# Altium PCB PCB1.PcbDoc
Units mm, origin at the board's own origin, x right, y up, seen from the top; angles counter-clockwise.
Board outline 63.63 x 56.77 mm, 2 copper layers (Top Layer, Bottom Layer), stack 1.671 mm thick; 38 components, 28 nets, 99 pads, 18 vias.
Unrouted connection lines stored in the file: 6.
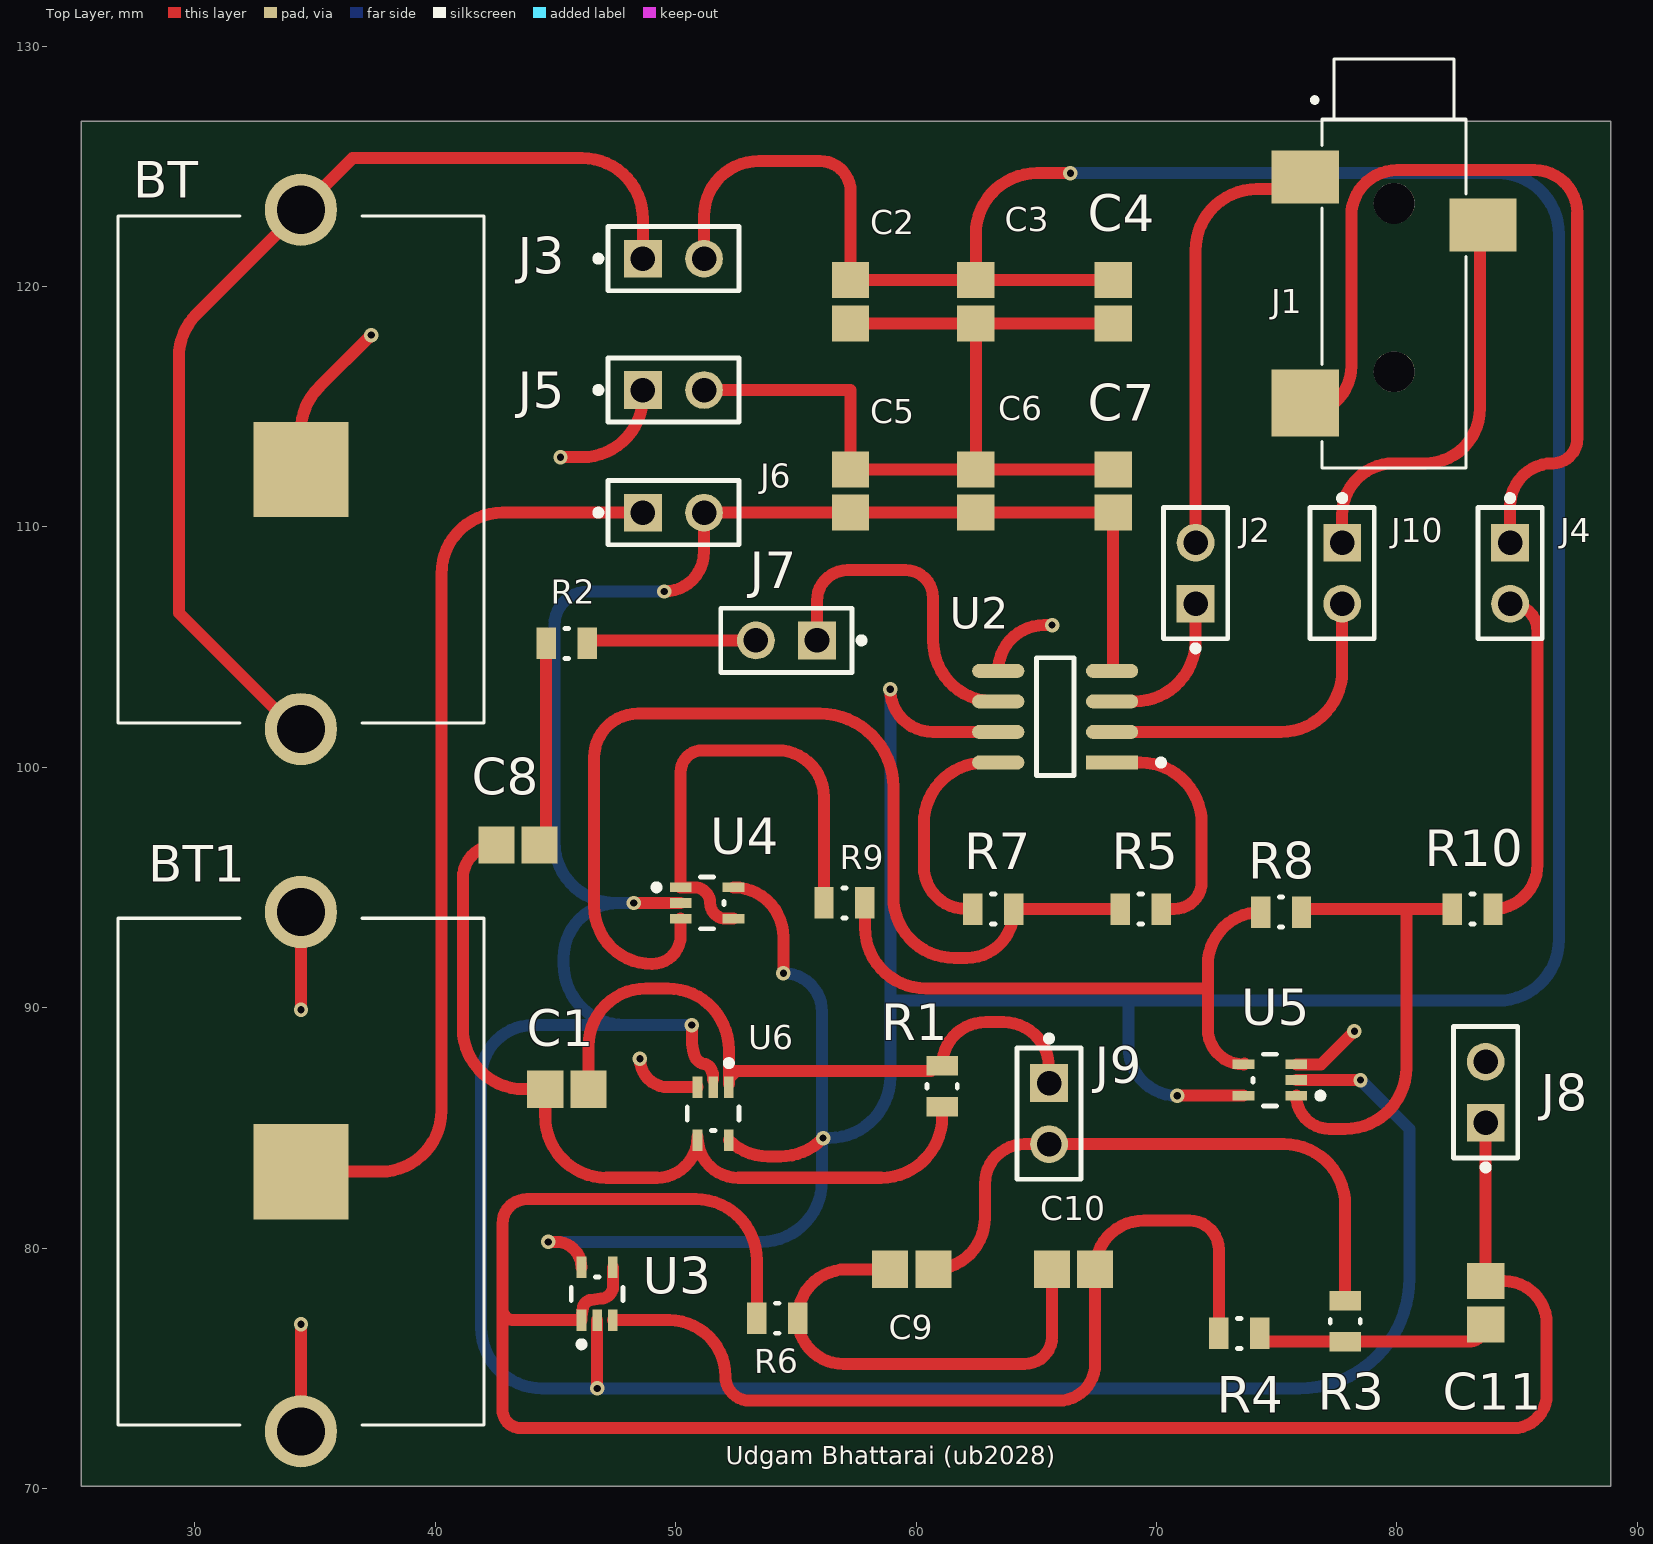
[diagram p0: Top Layer view]
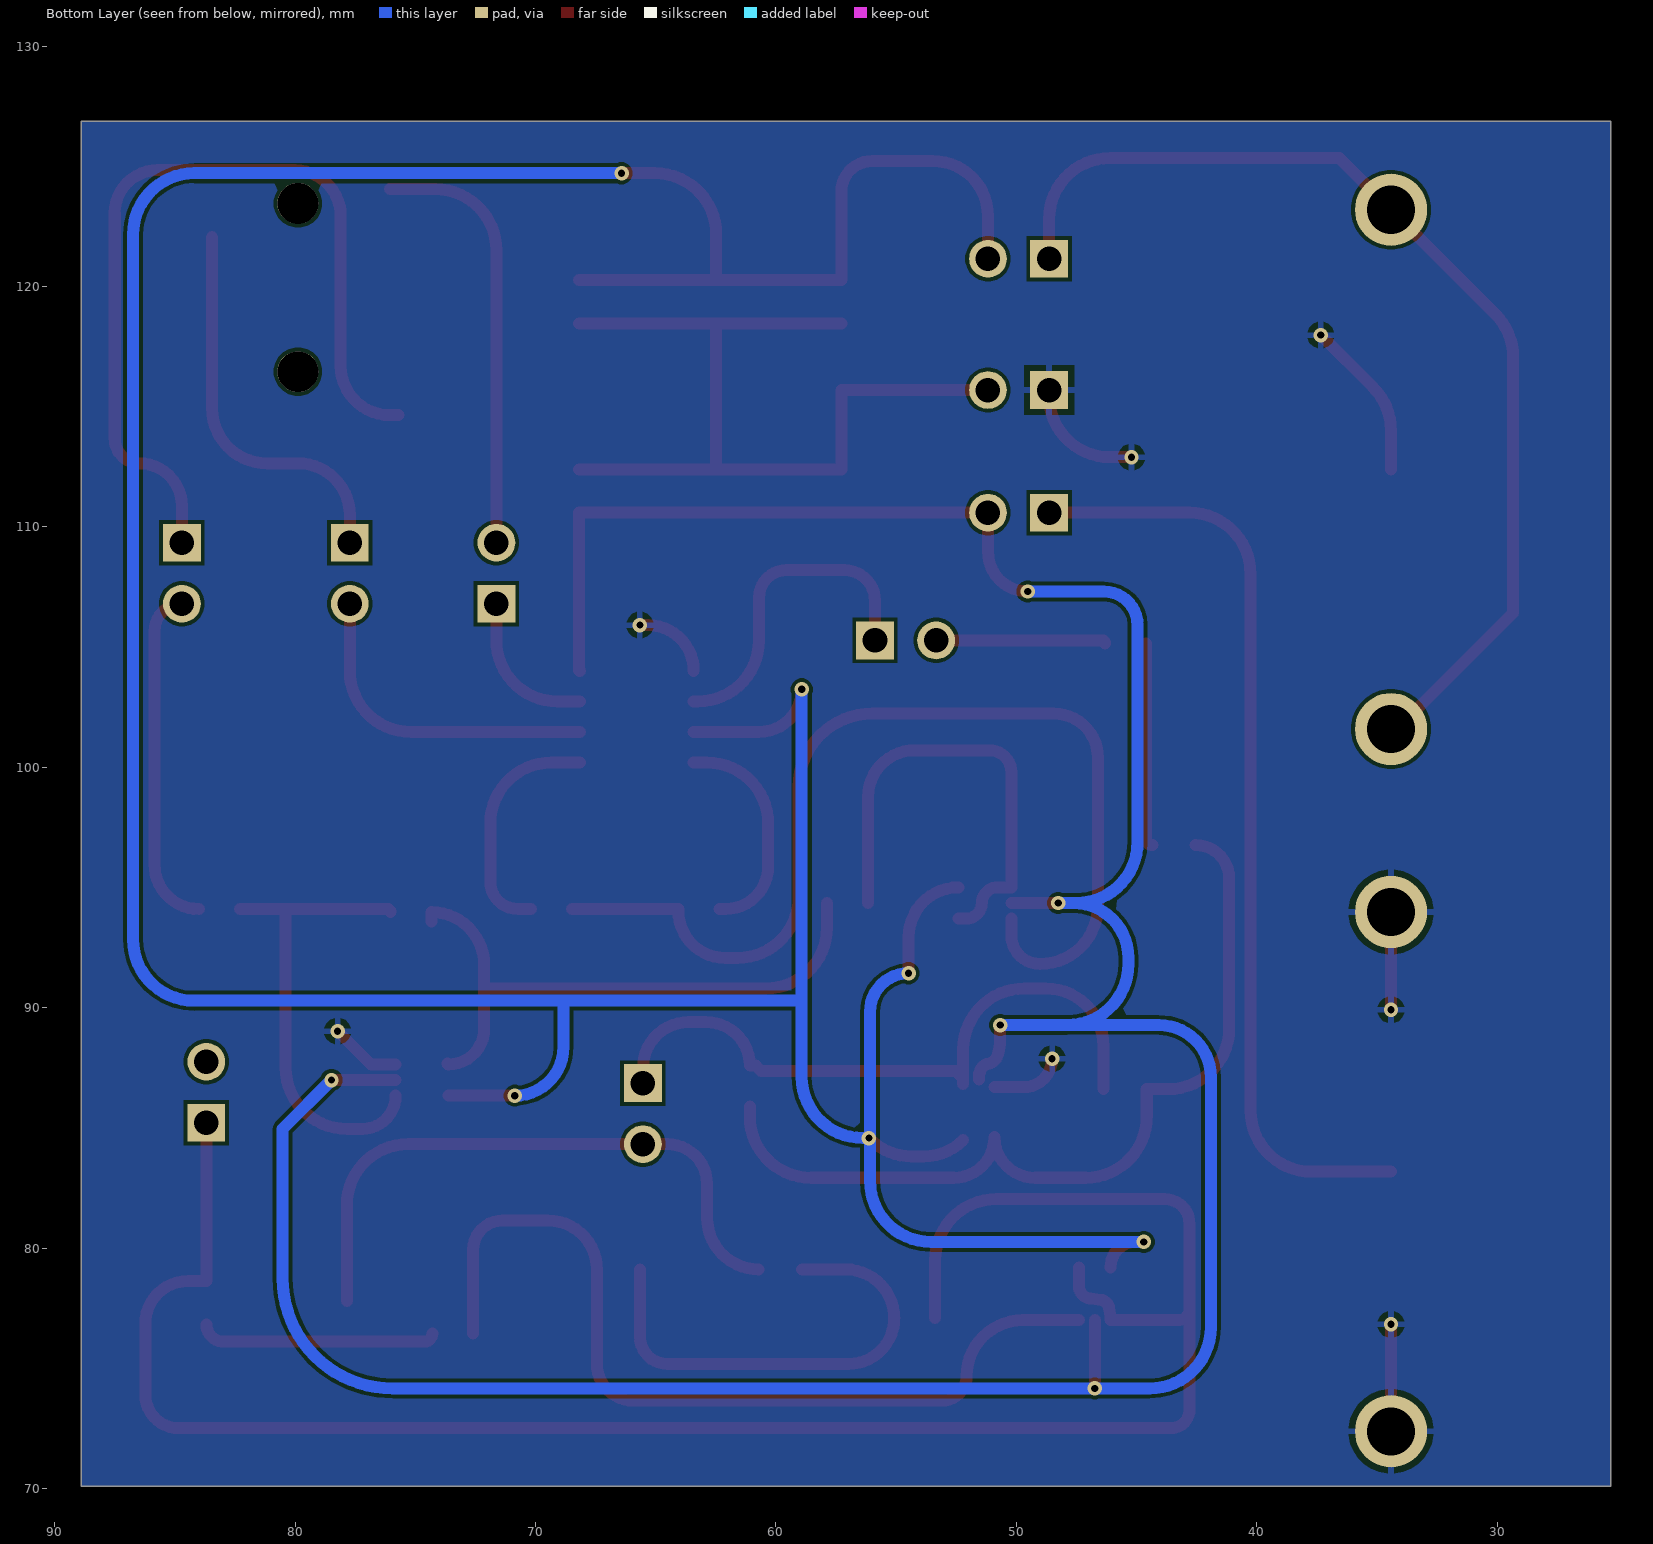
[diagram p1: Bottom Layer view, seen from below]
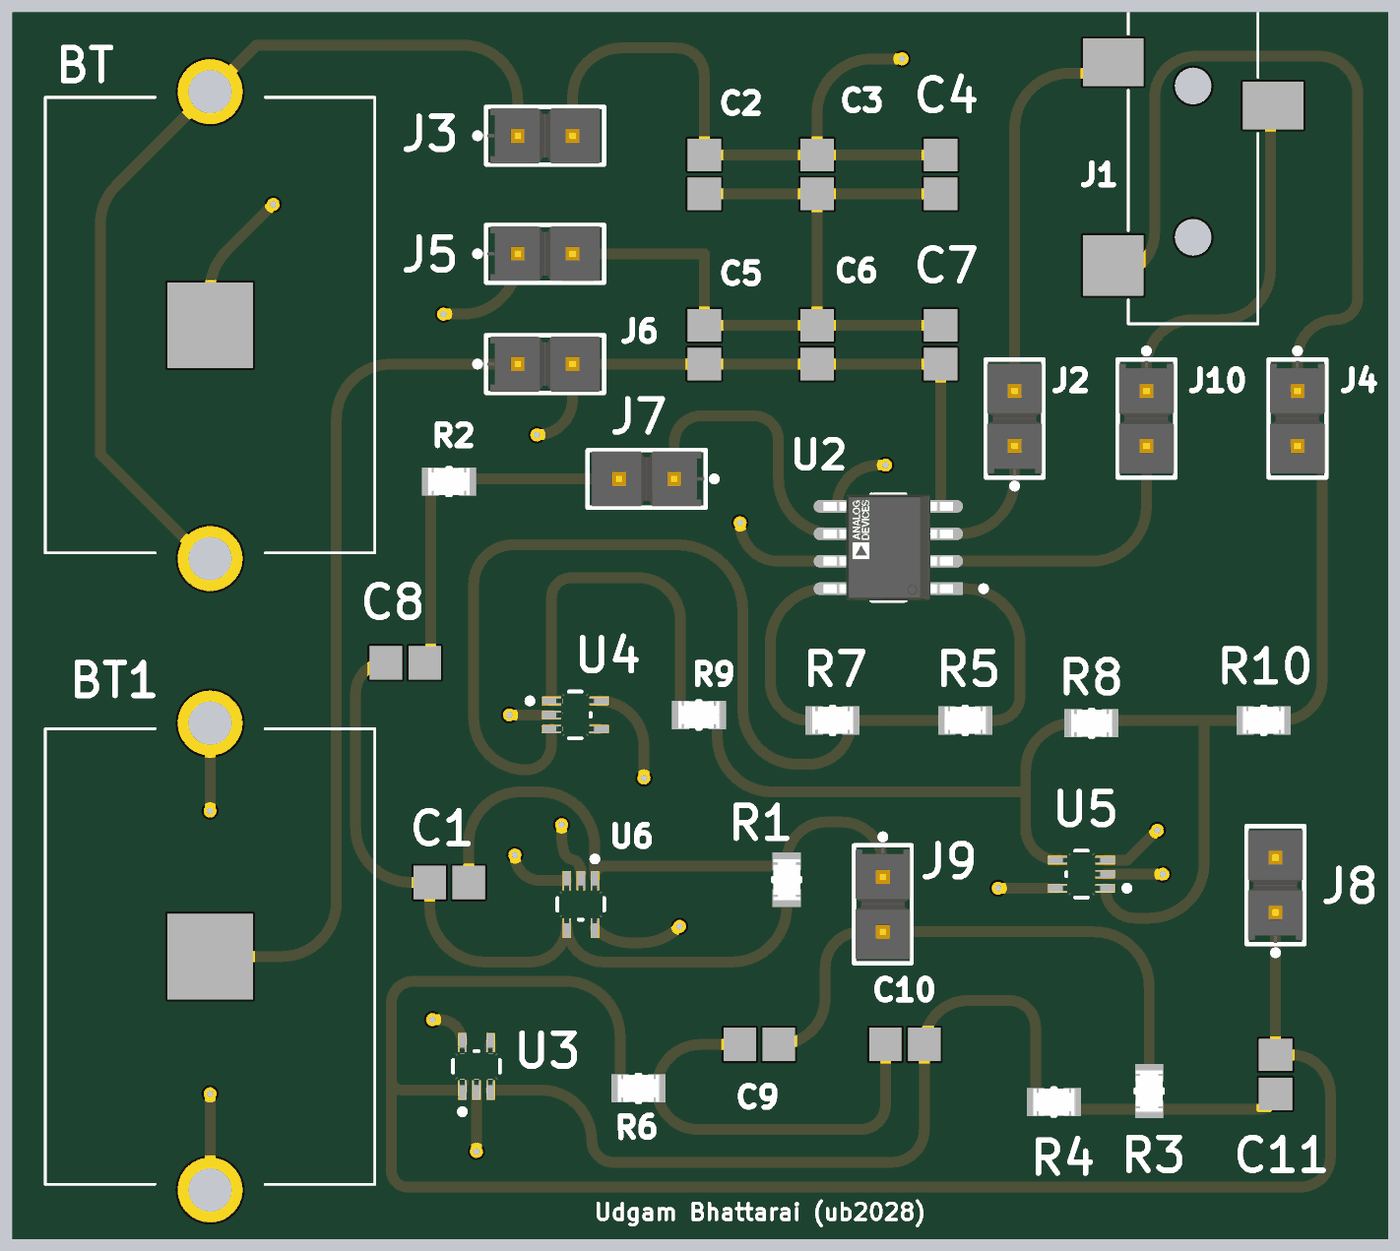
[diagram p2: 3D render of the assembled board from above, using the file's embedded part models]

## Layer stack, top to bottom
Top Solder: solder mask 0.0102, Solder Resist, Dk 3.5
Top Layer: signal copper 0.0356
Dielectric 1: dielectric 1.6, FR-4, Dk 4.8
Bottom Layer: signal copper 0.0356
Bottom Solder: solder mask 0.0102, Solder Resist, Dk 3.5

## Board outline
25.273,70.104 25.273,126.873 88.9,126.873 88.9,70.104

## Design rules (kind name [scope] priority, off if disabled: settings)
Clearance [All] p1: gap=0.15 ignorepadtopadclearanceinfootprint=TRUE except(0.3: Arc-Via Track-Via)
HoleSize [All] p1: absolutevalues=TRUE maxlimit=6 minlimit=0.254 maxpercent=80.000 minpercent=20.000
MinimumSolderMaskSliver [All] p1: minsoldermaskwidth=0.095
PolygonConnect [All] p1: connectstyle=Relief reliefconductorwidth=0.254 reliefentries=4 polygonreliefangle="90 Angle" airgapwidth=0.254
RoutingVias [All] p1: holewidth=0.3 width=0.6 viastyle="Through Hole" minholewidth=0.3 minwidth=0.6 maxholewidth=0.3 maxwidth=0.6
SilkToSilkClearance [All] p1: silktosilkclearance=0.15
SilkToSolderMaskClearance [IsPad] p1: minsilkscreentomaskgap=0.1 clearancetoexposedcopper=TRUE
SolderMaskExpansion [All] p1: expansion=0.102 istentingtop=FALSE
SupplyNets "Schematic Supply Nets" [InNet('GND')] p1: voltage=0.000
UnRoutedNet [All] p1: checkbadconnections=TRUE
Width [All] p1: maxlimit=1 minlimit=0.3 preferedwidth=0.5
25 further rules are at their usual default settings.

## Components (designator, comment, footprint, x,y, rotation, side; value= is the part's Value field where it differs from the comment)
BT "BK-913-TR" BAT_BK-913-TR 34.417,112.395 r270 top
BT1 "BK-913-TR" BAT_BK-913-TR 34.417,83.185 r270 top
C1 "C0805C225K9PACTU" CAPC2013X145X50ML20T25 45.477,86.614 r180 top
C2 "C0805C225K9PACTU" CAPC2013X145X50ML20T25 57.277,119.369 r90 top
C3 "C0805C225K9PACTU" CAPC2013X145X50ML20T25 62.484,119.369 r90 top
C4 "C0805C225K9PACTU" CAPC2013X145X50ML20T25 68.199,119.369 r90 top
C5 "C0805C225K9PACTU" CAPC2013X145X50ML20T25 57.277,111.495 r90 top
C6 "C0805C225K9PACTU" CAPC2013X145X50ML20T25 62.484,111.495 r90 top
C7 "C0805C225K9PACTU" CAPC2013X145X50ML20T25 68.199,111.495 r90 top
C8 "C0805C225K9PACTU" CAPC2013X145X50ML20T25 43.445,96.774 r0 top
C9 "C0805C225K9PACTU" CAPC2013X145X50ML20T25 59.817,79.121 r0 top
C10 "C0805C225K9PACTU" CAPC2013X145X50ML20T25 66.548,79.121 r180 top
C11 "C0805C225K9PACTU" CAPC2013X145X50ML20T25 83.693,77.735 r90 top
J1 "SJ-3523-SMT-TR" CUI_SJ-3523-SMT-TR 79.883,123.459 r270 top
J2 "TSW-102-07-L-S" FP-TSW-102-07-L-S-MFG 71.628,108.077 r90 top
J3 "TSW-102-07-L-S" FP-TSW-102-07-L-S-MFG 49.911,121.158 r0 top
J4 "TSW-102-07-L-S" FP-TSW-102-07-L-S-MFG 84.709,108.077 r270 top
J5 "TSW-102-07-L-S" FP-TSW-102-07-L-S-MFG 49.911,115.697 r0 top
J6 "TSW-102-07-L-S" FP-TSW-102-07-L-S-MFG 49.911,110.595 r0 top
J7 "TSW-102-07-L-S" FP-TSW-102-07-L-S-MFG 54.61,105.283 r180 top
J8 "TSW-102-07-L-S" FP-TSW-102-07-L-S-MFG 83.693,86.487 r90 top
J9 "TSW-102-07-L-S" FP-TSW-102-07-L-S-MFG 65.532,85.598 r270 top
J10 "TSW-102-07-L-S" FP-TSW-102-07-L-S-MFG 77.724,108.077 r270 top
R1 "CRCW080516K0FKEA" FP-CRCW0805-e3-IPC_C 61.087,86.741 r90 top
R2 "CRCW080516K0FKEA" FP-CRCW0805-e3-IPC_C 45.466,105.156 r180 top
R3 "CRCW080516K0FKEA" FP-CRCW0805-e3-IPC_C 77.851,76.962 r270 top
R4 "CRCW080516K0FKEA" FP-CRCW0805-e3-IPC_C 73.444,76.454 r180 top
R5 "CRCW080516K0FKEA" FP-CRCW0805-e3-IPC_C 69.342,94.107 r0 top
R6 "CRCW080516K0FKEA" FP-CRCW0805-e3-IPC_C 54.229,77.089 r0 top
R7 "CRCW080516K0FKEA" FP-CRCW0805-e3-IPC_C 63.208,94.107 r0 top
R8 "CRCW080516K0FKEA" FP-CRCW0805-e3-IPC_C 75.184,93.98 r0 top
R9 "CRCW080516K0FKEA" FP-CRCW0805-e3-IPC_C 57.023,94.361 r0 top
R10 "CRCW080516K0FKEA" FP-CRCW0805-e3-IPC_C 83.147,94.107 r0 top
U2 "AD620ARZ-REEL7" FP-R-8-IPC_B 65.786,102.108 r180 top
U3 "TLV521DCKT" FP-DCK0005A-MFG 46.736,78.105 r90 top
U4 "TLV521DCKT" FP-DCK0005A-MFG 51.308,94.361 r0 top
U5 "TLV521DCKT" FP-DCK0005A-MFG 74.719,86.995 r180 top
U6 "TLV521DCKT" FP-DCK0005A-MFG 51.562,85.598 r270 top

## Footprints (in the part's own frame and the unit in brackets; to place one, negate y for a bottom-side part, rotate by r counter-clockwise, add the part's x,y. Pads: shape width x height; smd on the part's side, far side on the other; paste and mask are expansions set on the pad)
BAT_BK-913-TR [mm]
  round 3 hole 2: 1(-10.8,0) 2(10.8,0)
  rect 3.96x3.96 smd: 3(0,0)
  silkscreen extent -10.54,-7.62 10.54,7.62
CAPC2013X145X50ML20T25 [mm] "Chip Capacitor, 2-Leads, Body 2.00x1.25mm, IPC Low Density"
  rect 1.5x1.55 smd: 1(-0.9,0) 2(0.9,0)
  body extent -1.1,-0.72 1.1,0.72, height 1.45
CUI_SJ-3523-SMT-TR [mm]
  rect 2.2x2.8 smd: 1(-1.1,-3.7) 3(0.9,3.7)
  rect 2.8x2.8 smd: 2(8.3,-3.7)
  round 1.7 hole 1.7 unplated: ""(0,0) ""(7,0)
  silkscreen extent -6,-3.4 11,3
FP-CRCW0805-e3-IPC_C [mil]
  rect 31.75x51.5 smd paste+0 mask+0: 1(-33.5,0) 2(33.5,0)
  silkscreen extent -3,-25 3,25, body extent -53,-31 53,31, height 10
FP-DCK0005A-MFG [mm]
  rect 0.9x0.4 smd paste-1000 mask+0: 1(-1.1,0.65) 2(-1.1,0) 3(-1.1,-0.65) 4(1.1,-0.65) 5(1.1,0.65)
  silkscreen extent -2.22,-1.07 0.7,1.07, body extent -1.65,-1.33 1.65,1.33, height 0.25
FP-R-8-IPC_B [mm]
  rect 2.174x0.582 smd paste+0 mask+0: 1(-2.366,1.905)
  rrect100% 2.174x0.582 smd paste+0 mask+0: 2(-2.366,0.635) 3(-2.366,-0.635) 4(-2.366,-1.905) 5(2.366,-1.905) 6(2.366,-0.635) 7(2.366,0.635) 8(2.366,1.905)
  silkscreen extent -4.53,-2.45 0.78,2.45, body extent -3.7,-2.7 3.7,2.7, height 0.25
FP-TSW-102-07-L-S-MFG [mm]
  rect 1.57x1.57 hole 1.02 paste-2539.97 mask+0: 1(-1.27,0)
  round 1.57 hole 1.02 paste-2539.97 mask+0: 2(1.27,0)
  silkscreen extent -3.25,-1.34 2.73,1.34, body extent -2.83,-1.44 2.83,1.44, height 0.25

## Part data
BT BT1: "Battery Retainer Coin, 20.0mm 1 Cell PC Pin", Package="MSOP-12 MPD", Digi-Key_Part_Number=BK-913-CT-ND, MF="MPD (Memory", MP=BK-913-TR, SnapEDA_Link=https://www.snapeda.com/parts/BK-913-TR/MPD%20(Memory%20Protection%20Devices)/view-part/576523/?ref=snap
C1 C2 C3 C4 C5 C6 C7 C8 C9 C10 C11: library part CMP-1036-04819-2, Manufacturer=Kemet, Part Number=C0805C225K9PACTU
J1: "<b>Audio Jack Connector</b> 3.5 mm Low Profile Surface Mount Stereo Jack, 3 Pin Right-Angle", Package=None, Availability=Unavailable, MP=SJ-3523-SMT-TR, Price=None
J2 J3 J4 J5 J6 J7 J8 J9 J10: library part CMP-02766-001428-1, "CONN HEADER VERT 2POS 2.54MM", Color=Black, Current Rating=7.6A, Max Operating Temperature=125°C, Max Voltage Rating (AC)=550V, Min Operating Temperature=-55°C, Package Quantity=1, Connector Type="Male Pin", Contact Material=Bronze, Contact Mating Length=0.23inch, Contact Plating=Gold, Contact Type="Male Pin", Depth=2.54mm, Gender=Male, Housing Color=Black, Housing Material=Polyester, Lead Free="Lead Free", Length=5.08mm, Max Current Rating=7.6A, Mount="Through Hole", Number of Contacts=2, Number of Positions=2, Number of Rows=1, Orientation=Straight, Packaging=Bulk, Pitch=2.54mm, Radiation Hardening=No, REACH SVHC="No SVHC", RoHS Compliant=Yes, Series=TSW, Termination=Solder, Voltage Rating=550V, Width=2.54mm
R1 R2 R3 R4 R5 R6 R7 R8 R9 R10: library part CMP-2001-04979-2, "RES Thick Film, 16kΩ, 1%, 0.125W, 100ppm/°C, 0805", Case Code (Imperial)=0805, Case Code (Metric)=2012, Max Operating Temperature=155°C, Max Power Dissipation=125mW, Min Operating Temperature=-55°C, Package Quantity=10, Resistance=16kR, Temperature Coefficient=100ppm/°C, Tolerance=1%, Voltage Rating=150V, Case/Package=0805, Composition="Thick Film", Contact Plating=Tin, Depth=1.25mm, Features="Automotive AEC-Q200", Height=0.45mm, Lead Free="Lead Free", Length=2mm, Military Standard=Not, Mount="Surface Mount", Number of Pins=2, Number of Terminations=2, Packaging="Tape and Reel", Power Rating=125mW, Radiation Hardening=No, Termination=SMD/SMT, Voltage Rating (DC)=150V, Weight=0.000194oz, Width=1.25mm
U2: library part CMP-09116-000354-1, "IC INST AMP 1 CIRCUIT 8SOIC", Case/Package=SOIC, Dual Supply Voltage=15V, Input Bias Current=500pA, Input Offset Voltage (Vos)=30mV, Input Resistance=10GR, Max Dual Supply Voltage=18V, Max Operating Temperature=125°C, Max Power Dissipation=650mW, Min Dual Supply Voltage=2.3V, Min Operating Temperature=-55°C, Min Supply Voltage=4.6V, Nominal Supply Current=900uA, Operating Supply Current=1.3mA, Output Current per Channel=18mA, Package Quantity=1, Power Supply Rejection Ratio (PSRR)=140dB, -3db Bandwidth=1MHz, Bandwidth=800kHz, Common Mode Rejection Ratio=93dB, Contact Plating=Tin, Lead Free="Contains Lead", Mount="Surface Mount", Number of Channels=1, Number of Circuits=1, Number of Elements=1, Number of Pins=8, Operating Supply Voltage=18V, Packaging="Tape and Reel", Power Dissipation=650mW, Radiation Hardening=No, RoHS Compliant=Yes, Series=-, Slew Rate=1.2V/µs, Supply Current=900uA
U3 U4 U5 U6: library part CMP-04895-000072-1, "IC CMOS 1 CIRCUIT SC70-5", Case/Package=SC, Input Bias Current=1pA, Input Offset Voltage (Vos)=100uV, Max Operating Temperature=125°C, Min Operating Temperature=-40°C, Operating Supply Current=350nA, Output Current per Channel=12mA, Bandwidth=6kHz, Gain Bandwidth Product=6kHz, Lead Free="Lead Free", Mount="Surface Mount", Number of Amplifiers=1, Number of Channels=1, Number of Circuits=1, Number of Pins=5, Packaging="Cut Tape", REACH SVHC="No SVHC", Slew Rate=2.5V/µs

## Via types
v1: diameter 0.6, hole 0.3, Top Layer to Bottom Layer, 18 vias

## Nets (pads, with @x,y where several pads share a name; then routed paths per layer and width w, separated by ;. In a path a pad name is that pad's centre, name@x,y a point inside that pad or via, vN(x,y) a via of type N, cw(c..) or ccw(c..) an arc to the next point about the centre after c; other vN are vias at no path point)
DRL: R5.1 R7.2 U4.3 | length 44.4
  Top Layer w0.5: U4.3 50.208,93.007 cw(c49.022,93.007) 49.022,91.821 cw(c49.022,94.234) 46.609,94.234 46.609,100.414 cw(c48.43,100.414) 48.43,102.235 56.007,102.235 cw(c56.007,99.187) 59.055,99.187 59.055,94.615 ccw(c61.595,94.615) 61.595,92.075 62.103,92.075 ccw(c62.103,94.031) 64.059,94.031 R7.2 ; R7.2@64.097,94.107 R5.1
GND: BT1.1 BT1.2 BT.3 J5.1 U2.5 U5.3 U6.3 | length 29.7
  Top Layer w0.5: BT1.2 v1(34.417,76.835) ; v1(34.417,89.916) BT1.1 ; BT.3 34.417,114.01 cw(c36.957,114.01) 35.161,115.806 v1(37.338,117.983) ; v1(45.212,112.903) 46.101,112.903 ccw(c46.101,115.443) 48.641,115.443 J5.1 ; v1(48.514,87.884) ccw(c49.7,87.884) 49.7,86.698 U6.3 ; U2.5 cw(c65.325,104.013) 65.325,105.918 v1(65.659,105.918) ; U5.3 76.85,87.645 v1(78.232,89.027)
LA: J2.1 U2.3 | length 6.4
  Top Layer w0.5: U2.3 69.088,102.743 ccw(c69.088,105.283) 71.628,105.283 J2.1
NetBT1_3: BT1.3 J6.1 | length 39.5
  Top Layer w0.5: BT1.3 37.719,83.185 ccw(c37.719,85.725) 40.259,85.725 40.259,108.055 cw(c42.799,108.055) 42.799,110.595 J6.1
NetBT_1: BT.1 BT.2 J3.1 | length 44
  Top Layer w0.5: BT.2 cw(c34.417,102.196) 33.992,101.771 29.337,106.426 29.337,117.063 cw(c31.877,117.063) 30.081,118.859 BT.1 34.417,123.2 36.566,125.349 46.101,125.349 cw(c46.101,122.809) 48.641,122.809 J3.1
NetC2_1: C2.1 C3.1 C4.1 C5.2 C6.2 C7.2 J5.2 | length 37.3
  Top Layer w0.5: J5.2 57.277,115.697 C5.2 C6.2 ; C2.1 C4.1 ; C3.1 C6.2 ; C7.2 C6.2
NetC8_2: C8.2 R2.2 | length 8.5
  Top Layer w0.5: C8.2 ccw(c44.345,97.044) 44.615,97.044 R2.2
NetC9_1: C9.1 C10.2 R6.2 | length 20.1
  Top Layer w0.5: C9.1 57.112,79.121 ccw(c57.112,77.089) R6.2 ccw(c56.985,77.089) 56.985,75.184 64.516,75.184 ccw(c64.516,76.327) 65.659,76.327 65.659,79.121 C10.2
NetC10_1: C10.1 R4.2 U3.3 | length 37.3
  Top Layer w0.5: U3.3 49.741,77.005 cw(c49.741,74.676) 52.07,74.676 ccw(c53.086,74.676) 53.086,73.66 65.924,73.66 ccw(c65.924,75.184) 67.448,75.184 C10.1 cw(c69.48,79.121) 69.48,81.153 71.374,81.153 cw(c71.374,79.934) 72.593,79.934 R4.2
NetC11_1: C11.1 R3.2 R4.1 | length 10
  Top Layer w0.5: R4.1 ccw(c74.638,76.454) 74.638,76.111 R3.2 82.969,76.111 ccw(c82.969,76.835) C11.1
NetC11_2: C11.2 J8.1 R6.1 U3.1 U3.4 | length 87.1
  Top Layer w0.5: U3.4 47.386,78.305 47.348,78.213 cw(c46.886,78.405) 46.886,77.905 46.483,77.852 ccw(c46.536,77.455) 46.14,77.513 46.091,77.177 ccw(c46.586,77.105) 46.086,77.105 U3.1 43.264,77.005 cw(c43.264,77.47) 42.799,77.47 ; R6.1 53.378,79.502 ccw(c50.838,79.502) 50.838,82.042 43.815,82.042 ccw(c43.815,81.026) 42.799,81.026 42.799,77.47 ; J8.1 C11.2 84.455,78.635 cw(c84.455,76.857) 86.233,76.857 86.233,73.914 cw(c84.836,73.914) 84.836,72.517 43.561,72.517 cw(c43.561,73.279) 42.799,73.279 42.799,77.47
NetJ1_1: J1.1 J2.2 | length 18
  Top Layer w0.5: J2.2 71.628,121.511 cw(c74.168,121.511) 74.168,124.051 J1.1@76.056,124.051
NetJ1_2: J1.2 J4.1 | length 36.6
  Top Layer w0.5: J1.2@75.692,114.651 76.056,114.651 ccw(c76.056,116.7) 78.105,116.7 78.105,122.936 cw(c80.01,122.936) 80.01,124.841 85.725,124.841 cw(c85.725,123.063) 87.503,123.063 87.503,113.665 cw(c86.487,113.665) 86.487,112.649 ccw(c86.487,110.871) 84.709,110.871 J4.1
NetJ1_3: J1.3 J10.1 | length 17.3
  Top Layer w0.5: J10.1 77.724,110.49 cw(c79.883,110.49) 79.883,112.649 81.17,112.649 ccw(c81.17,114.935) 83.456,114.935 J1.3@83.456,122.051 ; J10.1@77.741,109.838 ccw(c78.232,109.838) J10.1@78.232,109.347
NetJ7_1: J7.1 U2.6 | length 13.8
  Top Layer w0.5: J7.1 55.88,106.934 cw(c57.15,106.934) 57.15,108.204 59.563,108.204 cw(c59.563,107.061) 60.706,107.061 60.706,105.283 ccw(c63.246,105.283) 63.246,102.743 U2.6
NetR5_2: R5.2 U2.1 | length 9.9
  Top Layer w0.5: U2.1 69.342,100.203 cw(c69.342,97.663) 71.882,97.663 71.882,95.25 cw(c70.739,95.25) 70.739,94.107 R5.2
NetR7_1: R7.1 U2.8 | length 9.4
  Top Layer w0.5: R7.1 62.103,94.107 cw(c62.103,95.885) 60.325,95.885 60.325,97.663 cw(c62.865,97.663) 62.865,100.203 U2.8
NetR8_1: R8.1 R9.2 U5.4 | length 25.6
  Top Layer w0.5: R9.2 57.874,93.345 ccw(c60.414,93.345) 60.414,90.805 72.136,90.805 ; U5.4@73.66,87.686 cw(c73.619,87.686) U5.4 cw(c73.619,89.128) 72.136,89.128 72.136,90.805 ; R8.1@74.333,93.599 R8.1 ccw(c74.333,91.783) 72.136,91.783 72.136,90.805
NetR8_2: R8.2 R10.1 U5.1 | length 19.7
  Top Layer w0.5: U5.1 ccw(c77.201,86.345) 77.201,84.963 77.851,84.963 ccw(c77.851,87.503) 80.391,87.503 80.391,94.107 ; R8.2 cw(c76.162,93.98) 76.162,94.107 80.391,94.107 ; R10.1 80.391,94.107
NetR9_1: R9.1 U4.1 U4.4 | length 19.7
  Top Layer w0.5: U4.4 52.085,93.711 cw(c52.085,94.361) 51.435,94.361 ccw(c50.785,94.361) 50.785,95.011 U4.1 50.208,99.802 cw(c51.117,99.802) 51.117,100.711 54.229,100.711 cw(c54.229,98.768) 56.172,98.768 R9.1
RA: J10.2 U2.2 | length 13.8
  Top Layer w0.5: U2.2 75.184,101.473 ccw(c75.184,104.013) 77.724,104.013 J10.2
RL: J4.2 R10.2 | length 14.9
  Top Layer w0.5: R10.2 ccw(c83.998,95.961) 85.852,95.961 85.852,105.664 ccw(c84.709,105.664) J4.2 J4.2@85.217,106.807
U1_in: C1.2 C8.1 R1.1 U6.4 | length 36.2
  Top Layer w0.5: C8.1 ccw(c42.545,95.377) 41.148,95.377 41.148,89.154 ccw(c43.688,89.154) 43.688,86.614 C1.2 44.577,85.471 ccw(c47.117,85.471) 47.117,82.931 49.218,82.931 ccw(c49.218,84.625) 50.912,84.625 ccw(c52.606,84.625) 52.606,82.931 58.547,82.931 ccw(c58.547,85.471) 61.087,85.471 R1.1
U1_out: C1.1 J9.1 R1.2 U6.1 | length 28.4
  Top Layer w0.5: C1.1 46.377,88.414 cw(c48.768,88.414) 48.768,90.805 49.672,90.805 cw(c49.672,88.265) 52.212,88.265 52.212,86.825 52.212,87.053 52.535,87.376 60.62,87.376 60.836,87.592 R1.2 cw(c62.903,87.592) 62.903,89.408 63.627,89.408 cw(c63.627,87.503) 65.532,87.503 J9.1
V_in_BPF: J7.2 R2.1 | length 7.1
  Top Layer w0.5: R2.1 cw(c46.444,105.156) 46.444,105.283 J7.2
V_in_TTN: C9.2 J9.2 R3.1 | length 26.1
  Top Layer w0.5: C9.2 ccw(c60.717,81.269) 62.865,81.269 62.865,82.677 cw(c64.516,82.677) 64.516,84.328 J9.2 75.311,84.328 cw(c75.311,81.788) 77.851,81.788 R3.1
VDD: C2.2 C3.2 C4.2 J3.2 U2.7 U3.5 U4.5 U5.5 U6.5 | length 179.1
  Top Layer w0.5: v1(44.704,80.264) 45.027,80.264 cw(c45.027,79.205) U3.5 ; J3.2 51.181,122.936 cw(c53.467,122.936) 53.467,125.222 56.007,125.222 cw(c56.007,123.952) 57.277,123.952 C2.2 C3.2 ; U6.5 ccw(c53.849,86.135) 53.849,83.82 54.356,83.82 ccw(c54.356,86.273) 56.09,84.538 v1(56.134,84.582) ; U4.5 cw(c52.408,92.936) 54.483,92.936 v1(54.483,91.44) ; v1(58.928,103.251) ccw(c60.706,103.251) 60.706,101.473 U2.7 ; v1(66.421,124.714) 65.024,124.714 ccw(c65.024,122.174) 62.484,122.174 C3.2 ; C4.2 C3.2 ; v1(70.866,86.345) U5.5
  Bottom Layer w0.5: v1(44.704,80.264) 53.551,80.264 ccw(c53.551,82.804) 56.091,82.804 56.091,89.832 ccw(c54.483,89.832) v1(54.483,91.44) ; v1@56.388,84.582 ccw(c56.388,87.122) 58.928,87.122 58.928,90.297 ; v1(58.928,103.251) 58.928,90.297 ; v1(66.421,124.714) 84.201,124.714 cw(c84.201,122.174) 86.741,122.174 86.741,92.837 cw(c84.201,92.837) 84.201,90.297 68.834,90.297 ; v1(70.866,86.345) cw(c70.866,88.377) 68.834,88.377 68.834,90.297 ; 58.928,90.297 68.834,90.297
VSS: C5.1 C6.1 C7.1 J6.2 U2.4 U3.2 U4.2 U5.2 U6.2 | length 137.1
  Top Layer w0.5: v1(46.736,74.168) U3.2 ; v1(48.26,94.361) U4.2 ; v1(49.53,107.315) ccw(c49.53,108.966) 51.181,108.966 J6.2 C5.1 C6.1 C7.1 68.199,104.06 cw(c68.152,104.06) U2.4 ; v1(50.673,89.281) 50.673,88.766 ccw(c53.213,88.766) 50.788,88.012 ccw(c51.264,88.162) 51.179,87.669 cw(c51.112,87.275) 51.51,87.317 51.562,87.265 U6.2@51.562,87.025 ; U5.2 v1(78.486,86.995)
  Bottom Layer w0.5: v1(48.26,94.361) 47.625,94.361 ; v1(49.53,107.315) 46.355,107.315 ccw(c46.355,105.918) 44.958,105.918 44.958,96.901 ccw(c47.498,96.901) 47.498,94.361 47.625,94.361 ; v1(50.673,89.281) 47.879,89.281 ; v1(78.486,86.995) 80.518,84.963 80.518,78.74 cw(c75.946,78.74) 75.946,74.168 v1(46.736,74.168) 44.45,74.168 cw(c44.45,76.708) 41.91,76.708 41.91,87.122 cw(c44.069,87.122) 44.069,89.281 47.879,89.281 ; 47.625,94.361 ccw(c47.625,92.075) 45.339,92.075 45.339,91.821 ccw(c47.879,91.821) 47.879,89.281
pads on no net: J1. J8.2

## Polygon pours and split planes (outlines as drawn)
GND on Bottom Layer "GND_L02_P000" (solid, pour order 0): 25.273,126.873 88.9,126.873 88.9,70.104 25.273,70.104

## Silkscreen, mask and mechanical layers (free items; w line width, h text height)
Top Overlay:
  text "Udgam Bhattarai (ub2028)" at 52.093,71.012 h0.75